# Altium PCB OS-2024-Badge-PCB-REV1.PcbDoc
Units mm, origin at the board's own origin, x right, y up, seen from the top; angles counter-clockwise.
Board outline 69.72 x 87.12 mm, 2 copper layers (Top Layer, Bottom Layer); 98 components, 73 nets, 274 pads, 69 vias.
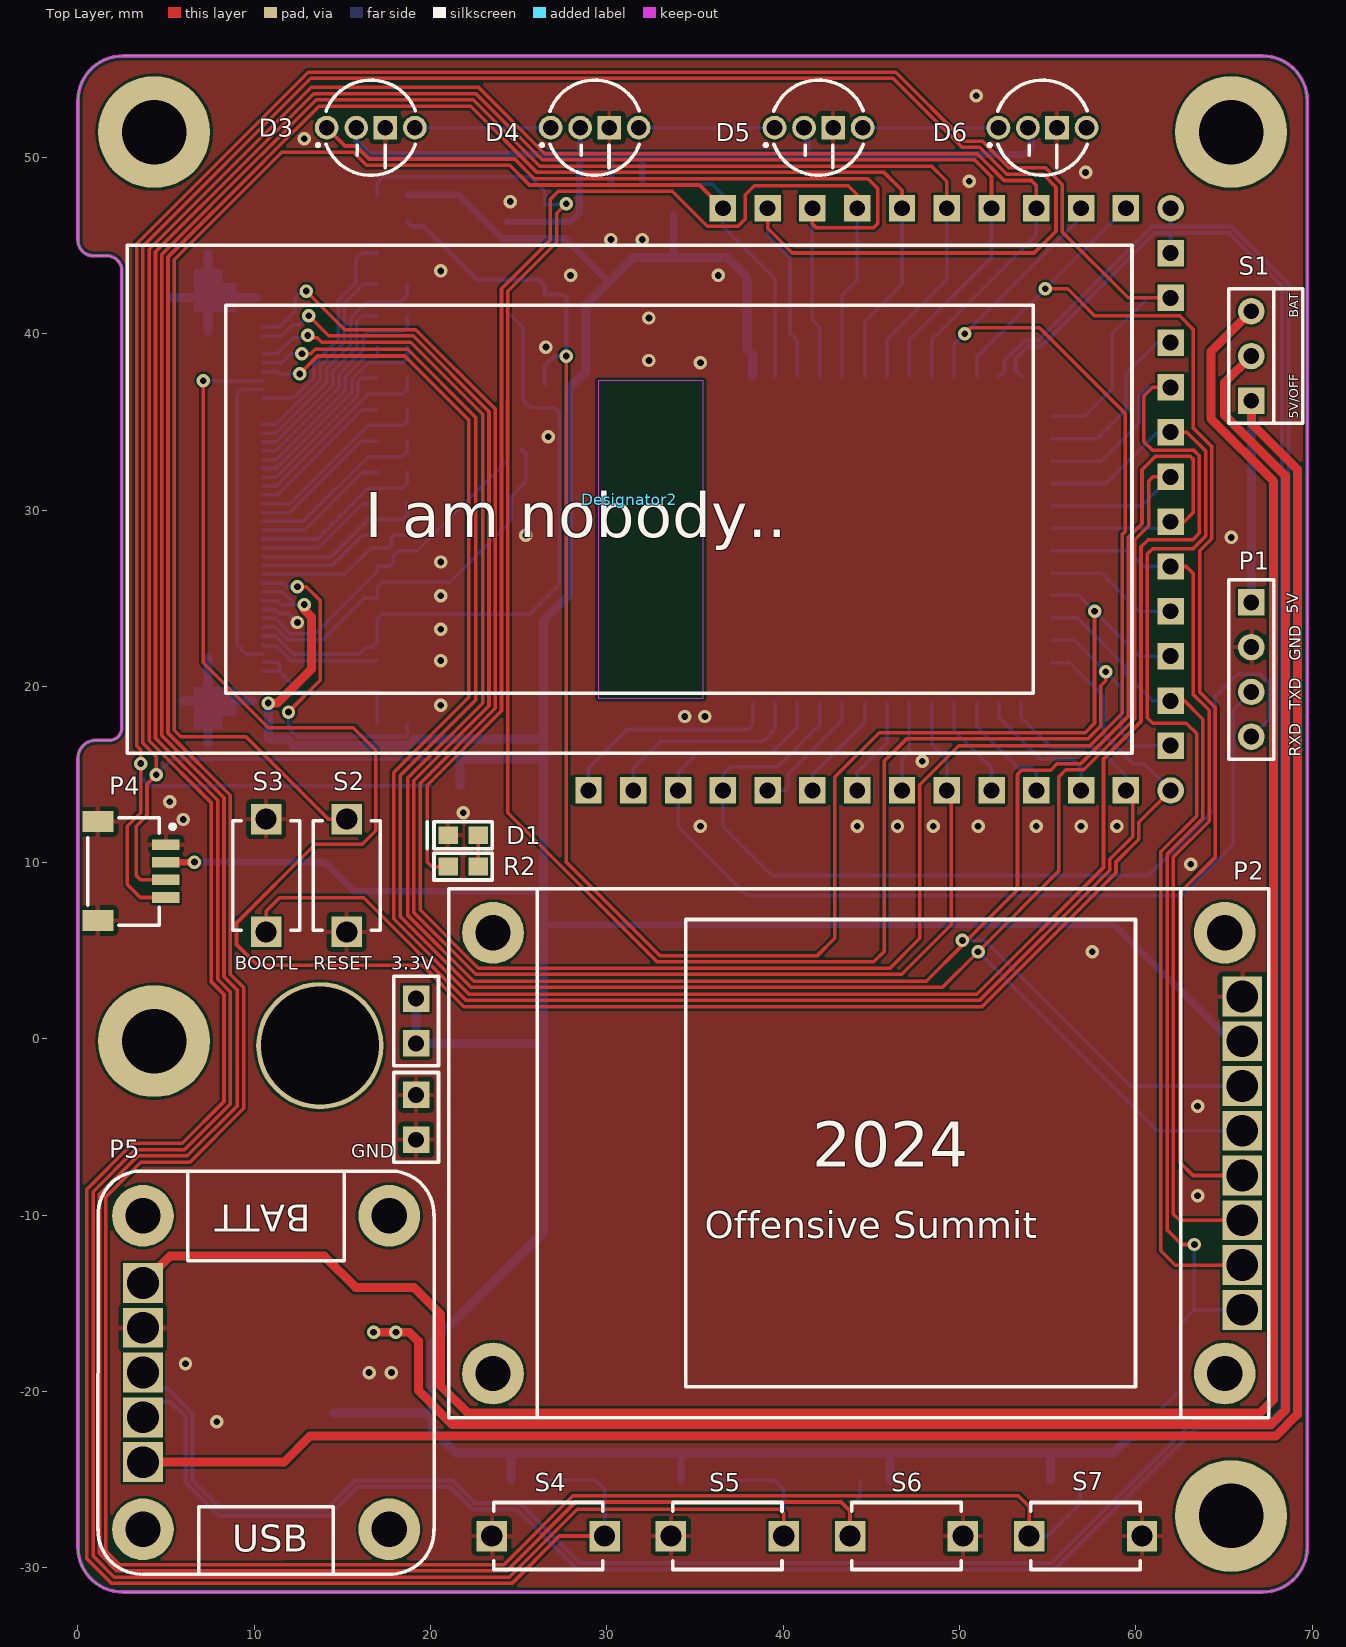
[diagram p0: Top Layer view]
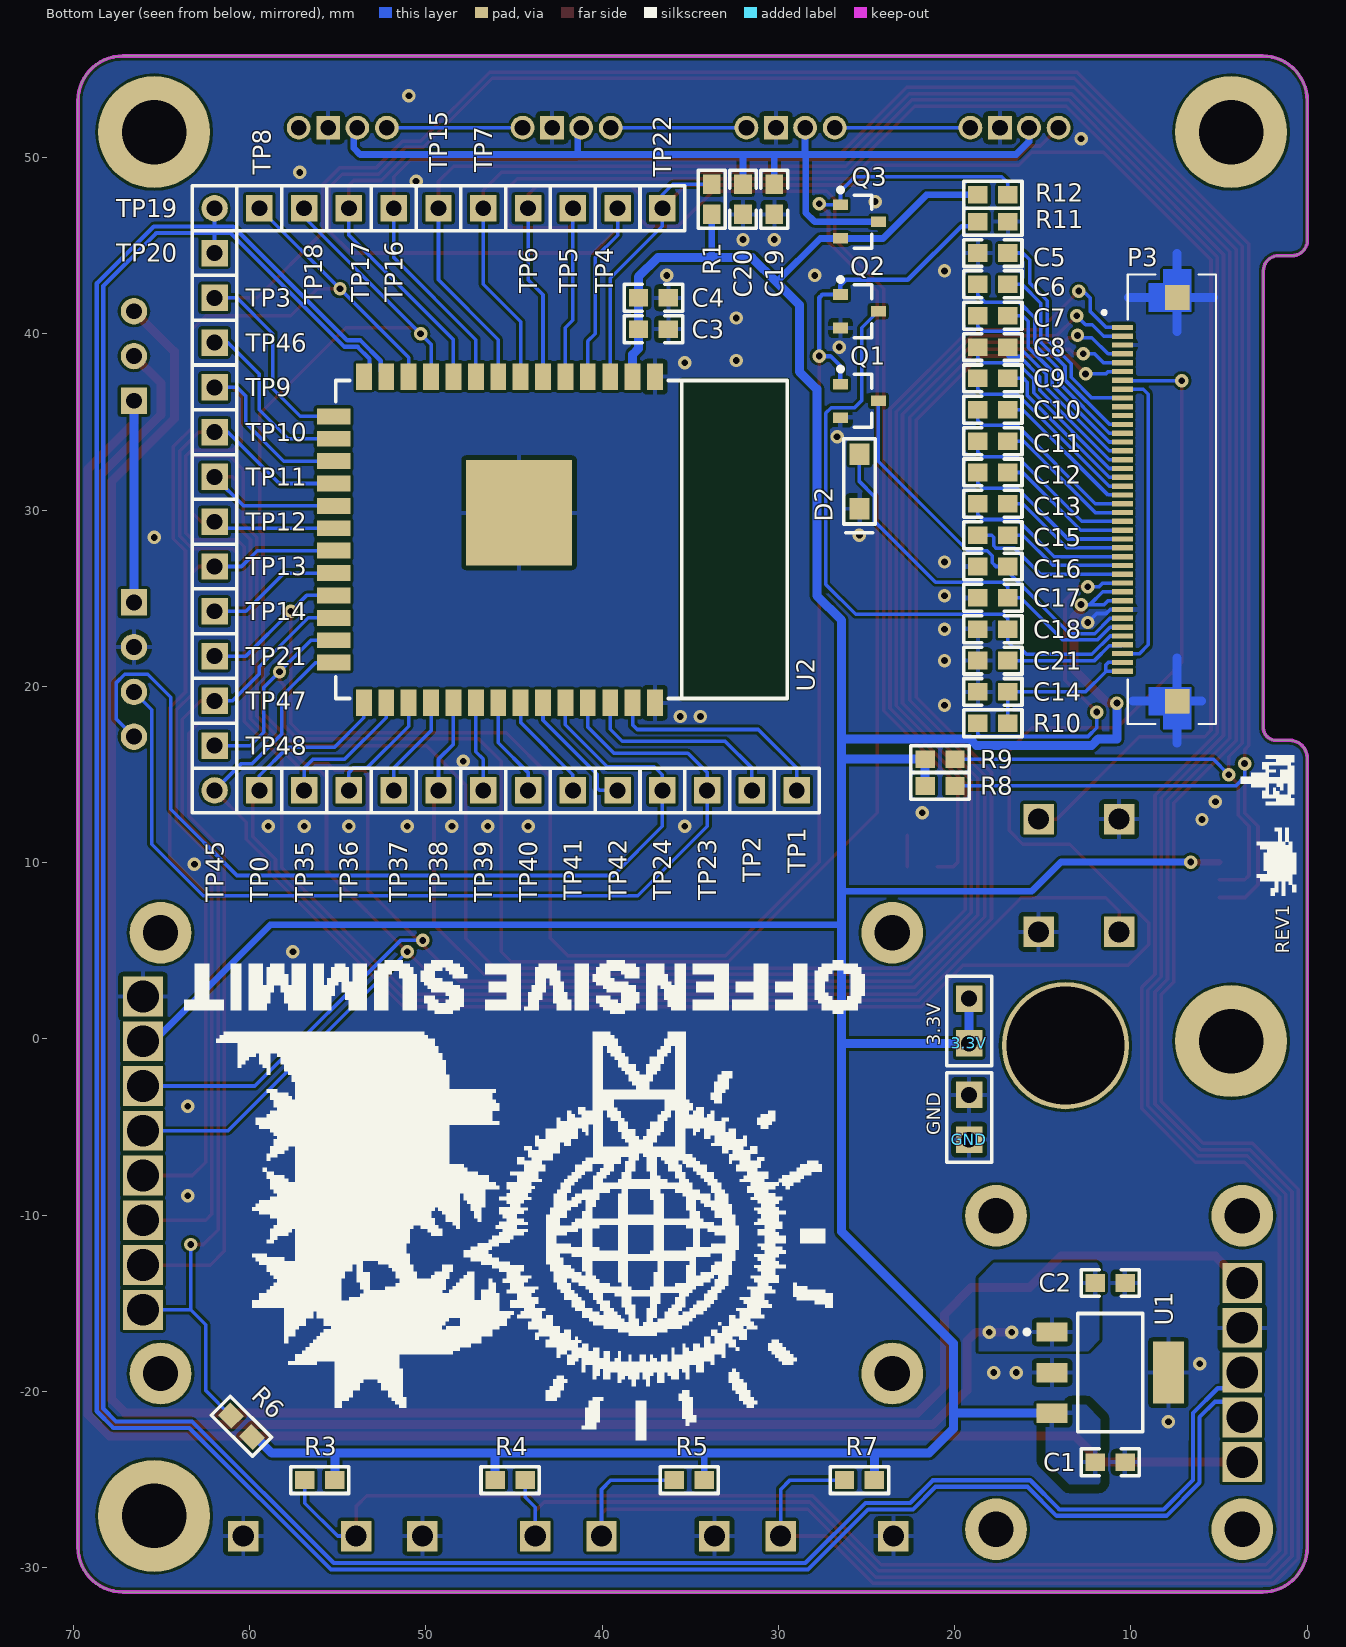
[diagram p1: Bottom Layer view, seen from below]

## Layer stack, top to bottom
Top Solder: solder mask 0.0102, Solder Resist, Dk 3.5
Top Layer: signal copper 0.0356
Dielectric1: dielectric 0.32, FR-4, Dk 4.8
Bottom Layer: signal copper 0.0356
Bottom Solder: solder mask 0.0102, Solder Resist, Dk 3.5

## Board outline
0,-28.829 0,15.926 cw(c1.016,15.926) 1.016,16.942 1.778,16.942 ccw(c1.778,17.653) 2.489,17.653 2.489,43.561 ccw(c1.626,43.561) 1.626,44.425 0.864,44.425 cw(c0.864,45.288) 0,45.288 0,53.213 cw(c2.54,53.213) 2.54,55.753 67.183,55.753 cw(c67.183,53.213) 69.723,53.213 69.723,-28.829 cw(c67.183,-28.829) 67.183,-31.369 2.54,-31.369 cw(c2.54,-28.829)

## Design rules (kind name [scope] priority, off if disabled: settings)
Clearance Clearance_2 [(InPolygon AND InNet('3.3V')) vs (InPolygon AND InNet('GND'))] p1: gap=0.508 ignorepadtopadclearanceinfootprint=FALSE
Clearance Clearance_3 [InNet('DP') vs InNet('DM')] p2: gap=0.127 ignorepadtopadclearanceinfootprint=FALSE except(0: Arc-Hole Track-Hole SMDPad-Hole THPad-Hole Via-Hole Fill-Hole Poly-Hole Region-Hole Text-Hole)
Clearance Clearance_1 [InNetClass('USB') vs InNet('GND')] p3: gap=0.127 ignorepadtopadclearanceinfootprint=FALSE except(0: Arc-Hole Track-Hole SMDPad-Hole THPad-Hole Via-Hole Fill-Hole Poly-Hole Region-Hole Text-Hole)
Clearance [All] p4: gap=0.152 ignorepadtopadclearanceinfootprint=FALSE except(0: Arc-Hole Track-Hole SMDPad-Hole THPad-Hole Via-Hole Fill-Hole Poly-Hole Region-Hole Text-Hole)
HoleSize [All] p1: absolutevalues=TRUE maxlimit=6.858 minlimit=0.381 maxpercent=80.000 minpercent=20.000
MinimumSolderMaskSliver [All] p1: minsoldermaskwidth=0.064
PolygonConnect PolygonConnect_1 [IsVia vs IsPolygon] p1: connectstyle=Direct reliefconductorwidth=0.254 reliefentries=4 polygonreliefangle="90 Angle" airgapwidth=0.254
PolygonConnect [All] p2: connectstyle=Relief reliefconductorwidth=0.254 reliefentries=4 polygonreliefangle="90 Angle" airgapwidth=0.254
RoomDefinition OS-2024-Badge-Schematic-REV1 [InComponentClass('OS-2024-Badge-Schematic-REV1')] p1: confinementstyle=ConfineIn formatcopy=TRUE lockcomponents=FALSE outline -227.64,-182.725 -176.84,-182.725 -176.84,-157.325 -227.64,-157.325
RoutingVias [All] p1: holewidth=0.381 width=0.762 viastyle="Through Hole" minholewidth=0.381 minwidth=0.762 maxholewidth=0.381 maxwidth=0.762
SilkToSolderMaskClearance SilkscreenOverComponentPads [IsPad] p1: minsilkscreentomaskgap=0.076 clearancetoexposedcopper=TRUE
SolderMaskExpansion [All] p1: expansion=0.102
Width Width_1 [InNetClass('USB')] p1: maxlimit=0.241 minlimit=0.241 preferedwidth=0.241
Width [All] p2: maxlimit=0.635 minlimit=0.203 preferedwidth=0.203
27 further rules are at their usual default settings.

## Classes and differential pairs
net class USB: DM DP

## Components (designator, comment, footprint, x,y, rotation, side; value= is the part's Value field where it differs from the comment)
3.3V "Test Point" Testpoint#1 19.177,-0.254 r90 bottom (schematic designator 2)
3.3V "Test Point" Testpoint#2 19.177,2.286 r90 bottom (schematic designator 1)
C1 "1u" 0603C 11.176,-24.003 r180 bottom
C2 "1u" 0603C 11.176,-13.843 r180 bottom
C3 "10u" 0603C 37.084,40.259 r180 bottom
C4 "100n" 0603C 37.084,42.037 r180 bottom
C5 "2.2u" 0603C 17.828,44.577 r180 bottom
C6 "2.2u" 0603C 17.828,42.799 r0 bottom
C7 "2.2u" 0603C 17.828,41.021 r0 bottom
C8 "2.2u" 0603C 17.828,39.243 r0 bottom
C9 "2.2u" 0603C 17.828,37.465 r0 bottom
C10 "2.2u" 0603C 17.828,35.687 r180 bottom
C11 "2.2u" 0603C 17.828,33.909 r180 bottom
C12 "2.2u" 0603C 17.828,32.131 r180 bottom
C13 "2.2u" 0603C 17.828,30.353 r180 bottom
C14 "1u" 0603C 17.828,19.685 r180 bottom
C15 "2.2u" 0603C 17.828,28.575 r180 bottom
C16 "2.2u" 0603C 17.828,26.797 r0 bottom
C17 "2.2u" 0603C 17.828,25.019 r0 bottom
C18 "2.2u" 0603C 17.828,23.241 r0 bottom
C19 "10u" 0603C 30.226,47.625 r270 bottom
C20 "1u" 0603C 32.004,47.625 r270 bottom
C21 "2.2u" 0603C 17.828,21.463 r0 bottom
D1 "LED2" 0603LED 21.844,11.557 r180 top
D2 "40V" SOD-123FL 25.4,31.623 r90 bottom
D3 "RGB" COM-12986 16.607,51.689 r0 top
D4 "RGB" COM-12986 29.307,51.689 r0 top
D5 "RGB" COM-12986 42.007,51.689 r0 top
D6 "RGB" COM-12986 54.707,51.689 r0 top
Designator2 "Comment" E2200CS021 31.282,30.607 r0 top
GND "Test Point" Testpoint#2 19.177,-3.175 r90 bottom
GND "Test Point" Testpoint#1 19.177,-5.715 r90 bottom
P1 "Header 4" HDR1X4 66.548,24.765 r270 top
P2 "Header 8" TFT144SPI 44.29,-6.477 r270 top
P3 "CONN FPC BOTTOM 40POS 0.5MM R/A" AMPHENOL_62684-401100AHLF 6.906,30.607 r90 bottom locked
P4 "SM04B-SRSS-TB" SM04B-TRSS-TB 3.048,9.525 r270 top
P5 "Header 5" MICRO-LIPO-USBC 10.668,-18.923 r270 top
Q1 "2N7002" SOT-23-N 25.4,36.195 r180 bottom
Q2 "2N7002" SOT-23-N 25.4,41.275 r180 bottom
Q3 "DMP2045U" SOT-23-P 25.4,46.355 r180 bottom
R1 "1k" 0603R 33.782,47.625 r270 bottom
R2 "1k" 0603R 21.844,9.779 r0 top
R3 "DNP" 0603R 56.007,-25.019 r180 bottom
R4 "DNP" 0603R 45.212,-25.019 r0 bottom
R5 "DNP" 0603R 35.052,-25.019 r180 bottom
R6 "330" 0603R 60.452,-21.971 r225 bottom
R7 "DNP" 0603R 25.4,-25.019 r180 bottom
R8 "10k" 0603R 20.828,14.351 r180 bottom
R9 "10k" 0603R 20.828,15.875 r180 bottom
R10 "2k" 0603R 17.828,17.907 r0 bottom
R11 "47k" 0603R 17.828,46.355 r180 bottom
R12 "47k" 0603R 17.828,47.879 r180 bottom
S1 "SW-SPDT" HDR1X3 66.548,36.195 r90 top
S2 "SPST-NO" PTS636SL43LFS 15.24,9.271 r270 top
S3 "SPST-NO" PTS636SL43LFS 10.668,9.271 r90 top
S4 "SPST-NO" PTS636SL43LFS 26.67,-28.194 r180 top
S5 "SPST-NO" PTS636SL43LFS 36.83,-28.194 r180 top
S6 "SPST-NO" PTS636SL43LFS 46.99,-28.194 r0 top
S7 "SPST-NO" PTS636SL43LFS 57.15,-28.194 r0 top
TP0 "Test Point" Testpoint#2 59.436,14.097 r0 bottom
TP1 "Test Point" Testpoint#2 28.956,14.097 r0 bottom
TP2 "Test Point" Testpoint#2 31.496,14.097 r90 bottom
TP3 "Test Point" Testpoint#2 61.976,42.037 r90 bottom
TP4 "Test Point" Testpoint#2 39.116,47.117 r0 bottom
TP5 "Test Point" Testpoint#2 41.656,47.117 r0 bottom
TP6 "Test Point" Testpoint#2 44.196,47.117 r90 bottom
TP7 "Test Point" Testpoint#2 46.736,47.117 r90 bottom
TP8 "Test Point" Testpoint#2 59.436,47.117 r90 bottom
TP9 "Test Point" Testpoint#2 61.976,36.957 r0 bottom
TP10 "Test Point" Testpoint#2 61.976,34.417 r0 bottom
TP11 "Test Point" Testpoint#2 61.976,31.877 r180 bottom
TP12 "Test Point" Testpoint#2 61.976,29.337 r270 bottom
TP13 "Test Point" Testpoint#2 61.976,26.797 r180 bottom
TP14 "Test Point" Testpoint#2 61.976,24.257 r90 bottom
TP15 "Test Point" Testpoint#2 49.276,47.117 r90 bottom
TP16 "Test Point" Testpoint#2 51.816,47.117 r180 bottom
TP17 "Test Point" Testpoint#2 54.356,47.117 r180 bottom
TP18 "Test Point" Testpoint#2 56.896,47.117 r180 bottom
TP19 "Test Point" Testpoint#3 61.976,47.117 r180 bottom
TP20 "Test Point" Testpoint#2 61.976,44.577 r90 bottom
TP21 "Test Point" Testpoint#2 61.976,21.717 r90 bottom
TP22 "Test Point" Testpoint#2 36.576,47.117 r0 bottom
TP23 "Test Point" Testpoint#2 34.036,14.097 r0 bottom
TP24 "Test Point" Testpoint#2 36.576,14.097 r90 bottom
TP35 "Test Point" Testpoint#2 56.896,14.097 r180 bottom
TP36 "Test Point" Testpoint#2 54.356,14.097 r90 bottom
TP37 "Test Point" Testpoint#2 51.816,14.097 r270 bottom
TP38 "Test Point" Testpoint#2 49.276,14.097 r90 bottom
TP39 "Test Point" Testpoint#2 46.736,14.097 r270 bottom
TP40 "Test Point" Testpoint#2 44.196,14.097 r180 bottom
TP41 "Test Point" Testpoint#2 41.656,14.097 r90 bottom
TP42 "Test Point" Testpoint#2 39.116,14.097 r90 bottom
TP45 "Test Point" Testpoint#3 61.976,14.097 r90 bottom
TP46 "Test Point" Testpoint#2 61.976,39.497 r90 bottom
TP47 "Test Point" Testpoint#2 61.976,19.177 r0 bottom
TP48 "Test Point" Testpoint#2 61.976,16.637 r0 bottom
U1 "TC1262-3.3VDBTR" SOT-223-2 11.176,-18.923 r270 bottom
U2 "ESP32-S3-WROOM" ESP32-S3-WROOM-1-N16R8 29.504,37.345 r270 bottom

## Footprints (in the part's own frame and the unit in brackets; to place one, negate y for a bottom-side part, rotate by r counter-clockwise, add the part's x,y. Pads: shape width x height; smd on the part's side, far side on the other; paste and mask are expansions set on the pad)
0603C [mm] "Chip Capacitor, Body 1.6x0.8mm, IPC High Density"
  rect 1.1x1 smd: 1(-0.85,0) 2(0.85,0)
  silkscreen extent -1.65,-0.76 1.65,0.76, body extent -0.87,-0.48 0.87,0.48, height 1.3
0603LED [mm] "Chip Diode; Body 1.6 x 0.9 mm (LxW typ)"
  rect 1.1x1 smd: 1(-0.85,0) 2(0.85,0)
  silkscreen extent -1.65,-0.76 2.03,0.76, body extent -0.8,-0.45 0.8,0.45, height 0.55
0603R [mm] "Chip Resistor; Body 1.6 x 0.9 mm (LxW typ)"
  rect 1.1x1 smd: 1(-0.85,0) 2(0.85,0)
  silkscreen extent -1.65,-0.76 1.65,0.76, body extent -0.8,-0.45 0.8,0.45, height 0.55
AMPHENOL_62684-401100AHLF [mm]
  rect 0.3x1.2 smd: 1(9.75,3.575) 2(9.25,3.575) 3(8.75,3.575) 4(8.25,3.575) 5(7.75,3.575) 6(7.25,3.575) 7(6.75,3.575) 8(6.25,3.575) 9(5.75,3.575) 10(5.25,3.575) 11(4.75,3.575) 12(4.25,3.575) 13(3.75,3.575) 14(3.25,3.575) 15(2.75,3.575) 16(2.25,3.575) 17(1.75,3.575) 18(1.25,3.575) 19(0.75,3.575) 20(0.25,3.575) 21(-0.25,3.575) 22(-0.75,3.575) 23(-1.25,3.575) 24(-1.75,3.575) 25(-2.25,3.575) 26(-2.75,3.575) 27(-3.25,3.575) 28(-3.75,3.575) 29(-4.25,3.575) 30(-4.75,3.575) 31(-5.25,3.575) 32(-5.75,3.575) 33(-6.25,3.575) 34(-6.75,3.575) 35(-7.25,3.575) 36(-7.75,3.575) 37(-8.25,3.575) 38(-8.75,3.575) 39(-9.25,3.575) 40(-9.75,3.575)
  rect 1.4x1.4 smd paste-2 mask+0: S1(-11.45,0.475) S2(11.45,0.475)
  Top Layer region: -10.65,-0.325 -13.05,-0.325 -13.05,1.275 -12.25,1.275 -12.25,2.075 -10.65,2.075
  Top Layer region: 12.25,1.275 13.05,1.275 13.05,-0.325 10.65,-0.325 10.65,2.075 12.25,2.075
  silkscreen extent -12.75,-1.73 12.75,4.71, body extent -12.75,-2.5 12.75,3.1, height 2
COM-12986 [mil] "ADDRESS LED DISCR SERIAL RGB 5PC"
  round 53 hole 35: 1(-98.43,0) 2(-32.48,0) 4(98.43,0)
  rect 53x53 hole 35: 3(32.48,0)
  silkscreen extent -121,-106 100,106
E2200CS021 [mm] "E2200CS021 DISPLAY 2.0\" B&W AURORA MB EC"
  silkscreen extent -28.5,-14.4 28.5,14.4, body extent -28.5,-14.4 28.5,14.4, height 1
ESP32-S3-WROOM-1-N16R8 [mm] "ESP32-S3-WROOM-1-N16R8"
  rect 1.5x0.9 smd: 1(-0.225,-7.493) 2(-0.225,-8.763) 3(-0.225,-10.033) 4(-0.225,-11.303) 5(-0.225,-12.573) 6(-0.225,-13.843) 7(-0.225,-15.113) 8(-0.225,-16.383) 9(-0.225,-17.653) 10(-0.225,-18.923) 11(-0.225,-20.193) 12(-0.225,-21.463) 13(-0.225,-22.733) 14(-0.225,-24.003) 27(18.284,-24.003) 28(18.284,-22.733) 29(18.284,-21.463) 30(18.284,-20.193) 31(18.284,-18.923) 32(18.284,-17.653) 33(18.284,-16.383) 34(18.284,-15.113) 35(18.284,-13.843) 36(18.284,-12.573) 37(18.284,-11.303) 38(18.284,-10.033) 39(18.284,-8.763) 40(18.284,-7.493)
  rect 0.9x1.9 smd paste-0.686: 15(2.03,-25.718) 16(3.3,-25.718) 17(4.57,-25.718) 18(5.84,-25.718) 19(7.11,-25.718) 20(8.38,-25.718) 21(9.65,-25.718) 22(10.92,-25.718) 23(12.19,-25.718) 24(13.46,-25.718)
  rect 0.9x1.9 smd: 25(14.73,-25.718) 26(16,-25.718)
  rect 6x6 smd paste-3.048: 101(7.5,-15.2)
  Keep-Out Layer region: 0,0 18.034,0 18.034,-5.969 0,-5.969
  silkscreen extent 0,-25.6 18.03,0
HDR1X3 [mm] "Connector; Header; 3 Position"
  rect 1.5x1.5 hole 0.9: 1(0,0)
  round 1.5 hole 0.9: 2(2.54,0) 3(5.08,0)
  silkscreen extent -1.27,-1.27 6.35,1.27
HDR1X4 [mm] "Connector; Header; 4 Position"
  rect 1.5x1.5 hole 0.9: 1(0,0)
  round 1.5 hole 0.9: 2(2.54,0) 3(5.08,0) 4(7.62,0)
  silkscreen extent -1.27,-1.27 8.89,1.27
MICRO-LIPO-USBC [mm] "Adafruit MicroLipo USB Charger"
  rect 2.257x2.257 hole 1.8: 1(5.08,-6.985) 2(2.54,-6.985) 3(0,-6.985) 4(-2.54,-6.985) 5(-5.08,-6.985)
  round 3.5 hole 2: M1(-8.89,6.985) M1(-8.89,-6.985) M1(8.89,6.985) M1(8.89,-6.985)
  silkscreen extent -11.43,-9.54 11.43,9.53
PTS636SL43LFS [mm] "Tactile Switch SPST-NO Top Actuated Through Hole"
  rect 1.727x1.727 hole 1.2: 1(-3.2,0) 2(3.2,0)
  silkscreen extent -3.1,-1.9 3.1,1.9, body extent -3.38,-1.75 3.38,1.75, height 5
SM04B-TRSS-TB [mm] "CONN HEADER SMD R/A 4POS 1MM"
  rect 1.2x1.749 smd: 0(-2.8,-1.912) 0(2.8,-1.912)
  rect 0.6x1.55 smd: 1(-1.5,1.938) 2(-0.5,1.938) 3(0.5,1.938) 4(1.5,1.938)
  silkscreen extent -3.02,-2.51 3.07,2.44, body extent -3.02,-2.51 3.07,1.56, height 6.25
SOD-123FL [mm] "DIODE SCHOTTKY 40V 2A SOD123FL"
  rect 1.22x1.15 smd: 1(-1.55,0) 2(1.55,0)
  silkscreen extent -2.92,-0.89 2.41,0.89, body extent -1.45,-0.95 1.45,0.95, height 1.1
SOT-23-N [mm] "MOSFET N-CH 60V 280MA SOT23-3"
  rect 0.85x0.6 smd: 1(-1.075,0.95) 2(-1.075,-0.95) 3(1.075,0)
  silkscreen extent -1.2,-1.5 0.7,1.92, body extent -0.7,-1.5 0.7,1.5, height 1.1
SOT-23-P [mm] "MOSFET P-CH 20V 4A SOT23-3"
  rect 0.85x0.6 smd: D(1.075,0) G(-1.075,0.95) S(-1.075,-0.95)
  silkscreen extent -1.2,-1.5 0.7,1.92, body extent -0.7,-1.5 0.7,1.5, height 1.1
SOT-223-2 [mm] "SOT-223/SC-73; 4 Leads; Body 6.7 x 7.3 mm, inc. leads (LxW max)"
  rect 1.1x1.75 smd: 1(-2.3,-3.3) 2(0,-3.3) 3(2.3,-3.3)
  rect 3.5x1.75 smd: 4(0,3.3)
  silkscreen extent -3.35,-4.85 3.35,1.85, body extent -3.35,-3.7 3.35,3.5, height 1.85
Testpoint#1 [mm] "1 Pos Header"
  rect 1.5x1.5 hole 0.9: 2(0,0)
  silkscreen extent -1.27,-1.27 1.27,1.27
Testpoint#2 [mm] "1 Pos Header"
  rect 1.5x1.5 hole 0.9: 1(0,0)
  silkscreen extent -1.27,-1.27 1.27,1.27
Testpoint#3 [mm] "1 Pos Header"
  round 1.5 hole 0.9: 1(0,0)
  silkscreen extent -1.27,-1.27 1.27,1.27
TFT144SPI [mm] "1.44\" 128x128 65K SPI Full Color TFT LCD Display Module ST7735 OLED for Arduino"
  rect 2.257x2.257 hole 1.8: 1(-8.89,21.75) 2(-6.35,21.75) 3(-3.81,21.75) 4(-1.27,21.75) 5(1.27,21.75) 6(3.81,21.75) 7(6.35,21.75) 8(8.89,21.75)
  round 3.5 hole 2: M1(-12.5,20.75) M2(12.5,20.75) M3(-12.5,-20.75) M4(12.5,-20.75)
  silkscreen extent -15,-23.25 15,23.25

## Part data
3.3V 3.3V GND GND TP0 TP1 TP2 TP3 TP4 TP5 TP6 TP7 TP8 TP9 TP10 TP11 TP12 TP13 TP14 TP15 TP16 TP17 TP18 TP19 TP20 TP21 TP22 TP23 TP24 TP35 TP36 TP37 TP38 TP39 TP40 TP41 TP42 TP45 TP46 TP47 TP48: library part TestPoint, "Test Point Do Not Populate", Distributor Part Number=NONE, Distributor=NONE, Manufacturer=NONE, Manufacturer Part Number=NONE, MFG-Comment="DO NOT POPULATE!"
C1 C2 C14 C20: library part Cap, "CAP CER 1UF 50V Z5U 0603", Distributor Part Number=490-12331-1-ND, Manufacturer="Murata Electronics North America", Manufacturer Part Number=GRT188R61H105ME13D, Distributor=Digikey
C3 C19: library part Cap, "CAP CER 10UF 10V X5R 0603", Distributor Part Number=490-14372-1-ND, Manufacturer="Murata Electronics North America", Manufacturer Part Number=GRN188R61A106KE69J, Distributor=Digikey
C4: library part Cap, "CAP CER .1UF 10V X7R 0603", Distributor Part Number=732-7939-1-ND, Manufacturer="Wurth Electronics Inc.", Manufacturer Part Number=885012206020, Distributor=Digikey
C5 C6 C7 C8 C9 C10 C11 C12 C13 C15 C16 C17 C18 C21: library part Cap, "CAP CER 2.2UF 10V X5R 0603", Distributor Part Number=2571-GMC10X5R225M10NTTR-ND, Manufacturer="Cal-Chip Electronics, Inc.", Manufacturer Part Number=GMC10X5R225M10NT, Distributor=Digikey
D1: "LED ORANGE CLEAR CHIP SMD", Distributor Part Number=754-1120-1-ND, Manufacturer=Kingbright, Manufacturer Part Number=AOT1608SECK, Distributor=Digi-Key
D2: library part "Diode BAT17", "DIODE SCHOTTKY 40V 2A SOD123FL", Distributor Part Number=3757-SS2040FL_R1_00001CT-ND, Manufacturer="Panjit International Inc.", Manufacturer Part Number=SS2040FL_R1_00001, Distributor=Digikey
D3 D4 D5 D6: library part LED2_1, "ADDRESS LED DISCR SERIAL RGB", Distributor Part Number=1568-1213-ND, Manufacturer="Spark Fun", Manufacturer Part Number=COM-12986, Distributor=Digi-Key
P1: "Header, 4-Pin", Distributor Part Number=732-5317-ND, Manufacturer="Wurth Elektronik", Manufacturer Part Number=61300411121, Distributor=Digi-Key
P2: library part Display_128_128, "1.44\" 128x128 65K SPI Full Color TFT LCD Display Module ST7735 OLED for Arduino", Distributor Part Number=ED90446-ND, Manufacturer=Mill-Max, Manufacturer Part Number=7406-0-15-15-18-27-10-0, Distributor=DigiKey, MFG-Comment="8 each for P2", Old Header=S7006-ND
P3: library part "Header 40", Distributor Part Number=609-62684-401100AHLFTR-ND, Manufacturer="Amphenol ICC (FCI)", Manufacturer Part Number=62684-401100AHLF, Distributor=Digi-Key
P4: library part "Header 5", "CONN HEADER SMD R/A 4POS 1MM", Distributor Part Number=455-SM04B-SRSS-TBCT-ND, Manufacturer="JST Sales America Inc.", Distributor=Digikey, Manufacturer Part Number=SM04B-SRSS-TB
P5: "Adafruit Micro-Lipo Charger for LiPoly Batt with USB Type C Jack", Distributor Part Number=ED90446-ND, Manufacturer=Mill-Max, Manufacturer Part Number=7406-0-15-15-18-27-10-0, Distributor=Digikey, MFG-Comment="5 each for P5"
Q1 Q2: library part NMOS-2, "MOSFET N-CH 60V 280MA SOT23-3", Distributor Part Number=4878-2N7002CT-ND, Manufacturer="Diotec Semiconductor", Distributor=Digikey, Manufacturer Part Number=2N7002
Q3: library part PMOS-2, "P-Channel Power MOSFET", Distributor Part Number=DMP2045U-7DICT-ND, Manufacturer="Diodes Incorporated", Manufacturer Part Number=DMP2045U-7, Distributor=Digikey
R1 R2: library part Res2, "RES SMD 1K OHM 5% 1/10W 0603", Distributor Part Number=311-1.0KGRCT-ND, Manufacturer=Yageo, Manufacturer Part Number=RC0603JR-071KL, Distributor=Digikey
R3 R4 R5 R7: library part Res2, "RES SMD 1K OHM 5% 1/10W 0603", Distributor Part Number=NONE, Distributor=NONE, Manufacturer=NONE, Manufacturer Part Number=NONE, MFG-Comment="DO NOT POPULATE"
R6: library part Res2, "RES SMD 330 OHM 5% 1/10W 0603", Distributor Part Number=311-330GRCT-ND, Manufacturer=Yageo, Manufacturer Part Number=RC0603JR-07330RL, Distributor=Digikey
R8 R9: library part Res2, "RES SMD 10K OHM 5% 1/10W 0603", Distributor Part Number=311-10KGRCT-ND, Manufacturer=Yageo, Manufacturer Part Number=RC0603JR-0710KL, Distributor=Digikey
R10: library part Res2, "RES SMD 2K OHM 5% 1/10W 0603", Distributor Part Number=311-2.0KGRCT-ND, Manufacturer=Yageo, Manufacturer Part Number=RC0603JR-072KL, Distributor=Digikey
R11 R12: library part Res2, "RES SMD 47K OHM 5% 1/10W 0603", Distributor Part Number=311-47KGRCT-ND, Manufacturer=Yageo, Manufacturer Part Number=RC0603JR-0747KL, Distributor=Digikey
S1: "SWITCH SLIDE SPDT 200MA 30V", Distributor Part Number=EG1903-ND, Manufacturer=E-Switch, Manufacturer Part Number=EG1218, Distributor=Digikey
S2 S3 S4 S5 S6 S7: library part "SPST-NO 2 PIN", "Tactile Switch SPST-NO Top Actuated Through Hole", Distributor Part Number=CKN12301-ND, Manufacturer=C&K, Manufacturer Part Number="PTS636 SL43 LFS", Distributor=Digikey
U1: library part "Header 3", "IC REG LINEAR 3.3V 500mA SOT223-3", Distributor Part Number=TC1262-3.3VDBCT-ND, Manufacturer="Microchip Technology", Distributor=Digikey, Manufacturer Part Number=TC1262-3.3VDBTR
U2: "Bluetooth, WiFi 802.11b/g/n, Bluetooth v5.0 Transceiver Module 2.4GHz PCB Trace Surface Mount", Distributor Part Number=1965-ESP32-S3-WROOM-1-N16R8TR-ND, Manufacturer="Espressif Systems", Manufacturer Part Number=ESP32-S3-WROOM-1-N16R8, Distributor=Digikey, MFG-Comment="No Solder paste on large GND pad, No solder paste on extra pads!!  See OS-2020-Badge-REV0-Assembly-Revised.pdf"

## Free pads (board coordinates)
  round 6.35 hole 3.658: 0(4.318,-0.127) 0(4.318,51.435) 0(65.405,-27.051) 0(65.405,51.435)
  round 7.214 hole 6.7: 0(13.716,-0.381)

## Via types
v1: diameter 0.762, hole 0.381, Top Layer to Bottom Layer, 69 vias

## Nets (pads, with @x,y where several pads share a name; then routed paths per layer and width w, separated by ;. In a path a pad name is that pad's centre, name@x,y a point inside that pad or via, vN(x,y) a via of type N, cw(c..) or ccw(c..) an arc to the next point about the centre after c; other vN are vias at no path point)
3.3V: 3.3V.1 3.3V.2 C1.1 C3.1 C4.1 P2.2 P3.31 P3.32 P4.2 Q3.S R1.2 R3.2 R4.2 R5.2 R6.2 R7.2 R8.1 R9.1 R12.1 U1.3 U2.2 | length 262.6
  Top Layer w0.381: P4.2 6.596,10.025 v1(6.604,10.033)
  Top Layer w0.508: v1(10.795,19.05) 11.303,19.05 13.233,20.98 13.233,23.948 12.827,24.355 v1(12.827,24.638)
  Bottom Layer w0.203: P3.32 11.303,24.857 11.522,24.638 12.324,24.638 ; P3.31 11.605,25.357 12.324,24.638 ; v1(12.827,24.638) 12.324,24.638
  Bottom Layer w0.381: v1(6.604,10.033) 13.97,10.033 15.621,8.382 26.416,8.382 ; R12.1 21.59,47.879 24.064,45.405 Q3.S 27.62,45.405 30.099,42.926 ; 26.416,6.477 58.801,6.477 65.405,-0.127 P2.2 ; 27.739,36.244 27.813,36.17 ; 33.782,44.323 R1.2 ; 34.036,-23.495 34.202,-23.661 R5.2
  Bottom Layer w0.508: v1(10.795,19.05) 10.795,17.018 11.855,17.018 12.228,16.645 18.76,16.645 19.116,17.001 26.306,17.001 26.416,16.891 ; U1.3 20.066,-21.223 ; 3.3V.1 3.3V.2 26.416,-0.254 ; R8.1 R9.1 26.416,15.875 ; R7.2 24.55,-23.495 ; U2.2 38.267,38.822 37.934,39.155 C3.1 C4.1 37.934,43.219 36.83,44.323 33.782,44.323 31.496,44.323 30.099,42.926 28.804,41.631 28.804,37.846 27.813,36.855 27.813,36.17 27.813,25.146 26.416,23.749 26.416,16.891 ; R4.2 46.062,-23.583 45.974,-23.495 ; R3.2 55.157,-23.534 55.118,-23.495 ; R6.2 59.646,-22.572 58.723,-23.495 55.118,-23.495 ; 20.066,-21.223 20.066,-22.098 21.463,-23.495 24.55,-23.495 ; 20.066,-21.223 20.066,-17.272 26.416,-10.922 26.416,-0.254 ; 24.55,-23.495 34.036,-23.495 45.974,-23.495 ; 26.416,-0.254 26.416,6.477 26.416,8.382 26.416,15.875 ; 26.416,15.875 26.416,16.891 ; 45.974,-23.495 55.118,-23.495
5V: P1.1 P5.1 S1.1 | length 136.6
  Top Layer w0.508: P5.1 11.684,-24.003 13.157,-22.53 67.934,-22.53 69.164,-21.3 69.164,32.309 66.548,34.925 S1.1
  Bottom Layer w0.508: P1.1 S1.1
BL: P2.8 R6.1 TP47.1 U2.24 | length 56.8
  Top Layer w0.203: TP47.1 62.763,19.177 63.805,18.136 63.805,12.502 61.773,10.47 61.773,-10.82 62.611,-11.659 v1(63.322,-11.659)
  Bottom Layer w0.203: U2.24 56.658,23.885 59.436,21.107 59.436,20.701 60.96,19.177 TP47.1 TP47.1@62.509,19.177 ; R6.1 62.484,-19.939 62.484,-16.205 63.322,-15.367 ; v1(63.322,-11.659) 63.322,-15.367 ; P2.8 63.322,-15.367
BORDER: P3.8 P3.38 | length 17.5
  Bottom Layer w0.203: P3.38 9.512,21.857 9.017,22.352 9.017,36.576 9.298,36.857 P3.8
BTN1: R3.1 S7.1 TP7.1 U2.7 | length 200
  Top Layer w0.203: TP7.1 46.736,48.133 45.72,49.149 26.03,49.149 22.271,52.908 13.665,52.908 10.82,50.063 10.404,49.647 5.105,44.348 5.105,17.358 8.636,13.828 8.636,3.678 9.398,2.916 9.398,-3.937 6.35,-6.985 3.556,-6.985 1.575,-8.966 1.575,-29.032 2.36,-29.817 11.712,-29.817 24.158,-29.817 28.067,-25.908 53.34,-25.908 53.95,-26.518 S7.1
  Bottom Layer w0.203: U2.7 44.617,40.68 46.736,42.799 TP7.1 ; S7.1@53.95,-27.94 54.204,-28.194 54.991,-28.194 56.857,-26.328 R3.1
BTN2: R4.1 S6.1 TP15.1 U2.8 | length 192.5
  Top Layer w0.203: S6.1 43.79,-26.772 43.282,-26.264 28.219,-26.264 24.31,-30.173 2.212,-30.173 1.219,-29.179 1.219,-8.814 3.404,-6.629 6.203,-6.629 9.042,-3.79 9.042,2.769 8.28,3.531 8.28,13.68 4.75,17.211 4.75,44.496 10.256,50.002 10.465,50.211 13.518,53.264 22.423,53.264 26.182,49.505 48.412,49.505 49.276,48.641 TP15.1
  Bottom Layer w0.203: S6.1 43.79,-26.568 44.362,-25.996 R4.1 ; U2.8 45.887,39.664 49.276,43.053 TP15.1
BTN3: R5.1 S5.1 TP16.1 U2.9 | length 196.7
  Top Layer w0.203: S5.1 40.03,-26.924 39.776,-26.67 28.326,-26.67 24.468,-30.528 2.065,-30.528 0.864,-29.327 0.864,-8.667 3.256,-6.274 6.055,-6.274 8.636,-3.693 8.636,2.667 7.925,3.378 7.925,13.533 4.394,17.064 4.394,44.643 10.109,50.358 13.371,53.619 22.57,53.619 26.33,49.86 50.851,49.86 51.816,48.895 TP16.1
  Bottom Layer w0.203: R5.1@35.902,-25.273 36.156,-25.019 39.497,-25.019 40.03,-25.552 S5.1 ; U2.9 47.157,39.664 51.816,44.323 TP16.1
BTN4: R7.1 S4.1 TP17.1 U2.10 | length 188.3
  Top Layer w0.203: S4.1 27.305,-28.194 24.615,-30.884 1.918,-30.884 0.508,-29.474 0.508,-8.519 3.109,-5.918 5.908,-5.918 8.28,-3.546 8.28,2.52 7.569,3.231 7.569,13.386 4.039,16.916 4.039,44.79 13.223,53.975 22.718,53.975 26.477,50.216 51.003,50.216 52.527,48.692 54.077,48.692 54.356,48.412 TP17.1
  Bottom Layer w0.203: R7.1@26.25,-25.273 26.504,-25.019 29.337,-25.019 29.87,-25.552 S4.1 ; U2.10 48.427,39.664 54.356,45.593 TP17.1
BUSY-D2: P3.2 TP38.1 U2.31 | length 91.9
  Top Layer w0.203: v1(13.081,41.021) 14.224,39.878 19.015,39.878 23.312,35.581 23.312,18.902 19.05,14.64 19.05,7.176 22.563,3.663 46.716,3.663 49.53,6.477 49.53,13.843 TP38.1
  Bottom Layer w0.203: P3.2 11.536,39.857 12.192,40.513 12.573,40.513 v1(13.081,41.021) ; U2.31 48.427,16.724 49.276,15.875 TP38.1
CLK-SCL: P2.3 P3.4 TP12.1 U2.20 | length 145.8
  Top Layer w0.203: v1@13.032,39.776 13.564,39.776 13.818,39.522 18.868,39.522 22.956,35.434 22.956,19.049 18.694,14.787 18.694,7.029 22.447,3.277 48.108,3.277 50.165,5.334 v1(50.165,5.588) 50.419,5.588 53.289,8.458 53.289,15.011 53.518,15.24 55.169,15.24 55.55,15.621 56.886,15.621 59.583,18.318 59.583,28.463 60.35,29.23 60.35,32.283 61.112,33.045 63.094,33.045 63.246,32.893 63.246,29.845 62.738,29.337 TP12.1
  Bottom Layer w0.203: P3.4 11.298,38.857 12.217,39.776 v1@13.032,39.776 ; v1(50.165,5.588) 51.435,5.588 59.69,-2.667 P2.3 ; U2.20 61.604,28.965 TP12.1
  other v1: 13.032,39.903
CS-D1: P2.7 TP10.1 U2.18 | length 66.5
  Top Layer w0.203: TP10.1 62.89,34.417 63.957,33.35 63.957,28.524 63.246,27.813 60.96,27.813 60.65,27.503 60.65,18.217 60.96,17.907 62.865,17.907 63.449,17.323 63.449,12.649 61.417,10.617 61.417,-12.014 62.23,-12.827 P2.7
  Bottom Layer w0.203: U2.18 58.302,31.505 61.214,34.417 TP10.1
CS-D2: P3.1 TP18.1 U2.11 | length 140.7
  Top Layer w0.203: v1(12.954,42.418) 15.138,40.234 19.163,40.234 23.668,35.729 23.668,18.754 19.406,14.492 19.406,7.323 22.71,4.019 46.056,4.019 47.74,5.703 47.74,14.42 49.957,16.637 57.399,16.637 59.228,18.466 59.228,28.61 59.411,28.793 59.411,35.458 54.534,40.335 50.622,40.335 v1(50.292,40.005)
  Bottom Layer w0.203: P3.1 11.401,40.357 12.319,41.275 12.319,42.037 12.573,42.291 v1@13.081,42.291 ; U2.11 49.697,39.41 v1(50.292,40.005) 56.896,46.609 TP18.1
DC-D1: P2.6 TP13.1 U2.21 | length 50.2
  Top Layer w0.203: TP13.1 62.865,26.797 63.246,26.416 63.246,19.558 64.16,18.644 64.16,12.355 62.128,10.323 62.128,-9.931 62.484,-10.287 P2.6
  Bottom Layer w0.203: U2.21 59.554,27.695 60.452,26.797 TP13.1
DISCHARGE: Q1.1 Q2.1 R11.1 TP21.1 U2.23 | length 103.1
  Top Layer w0.203: v1(27.686,38.735) 27.686,10.033 32.989,4.73 41.941,4.73 42.926,5.715 42.926,14.859 45.441,17.374 57.13,17.374 57.658,17.902 v1(57.658,24.257)
  Bottom Layer w0.203: U2.23 56.76,25.155 v1(57.658,24.257) 60.198,21.717 TP21.1
  Bottom Layer w0.254: R11.1 18.932,46.101 19.606,46.101 22.654,43.053 26.162,43.053 26.475,42.74 Q2.1 27.498,42.225 27.686,42.037 v1(27.686,38.735) 27.042,38.735 26.475,38.168 Q1.1
DM: P5.2 TP19.1 U2.13 | length 162.7
  Bottom Layer w0.241: P5.2@4.064,-21.082 4.572,-20.574 5.231,-20.574 6.109,-21.452 6.109,-25.172 7.988,-27.051 14.213,-27.051 15.864,-25.4 21.082,-25.4 22.365,-26.683 24.905,-26.683 28.321,-30.099 55.372,-30.099 63.411,-22.06 67.717,-22.06 68.663,-21.114 68.663,42.856 65.431,46.088 62.001,46.088 ; U2.13 52.553,37.886 52.553,38.468 53.708,39.624 54.452,39.624 60.916,46.088 62.001,46.088 ; TP19.1 61.976,46.114 62.001,46.088
DP: P5.3 TP20.1 U2.14 | length 161.7
  Bottom Layer w0.241: P5.3@3.556,-18.923 P5.3 4.572,-19.812 5.08,-19.812 6.477,-21.209 6.477,-25.019 8.141,-26.683 14.06,-26.683 15.711,-25.032 21.235,-25.032 22.517,-26.314 25.057,-26.314 28.474,-29.731 55.219,-29.731 63.259,-21.692 67.564,-21.692 68.294,-20.961 68.294,42.704 65.278,45.72 61.951,45.72 ; U2.14 53.188,37.89 53.188,38.583 53.861,39.256 54.604,39.256 61.069,45.72 61.951,45.72 ; TP20.1 61.976,45.695 61.951,45.72
EN: R1.1 S2.1 TP22.1 U2.3 | length 88.1
  Top Layer w0.203: S2.1 14.199,12.471 9.525,17.145 5.822,17.145 5.461,17.506 5.461,44.201 11.552,50.292 15.626,50.292 16.363,49.555 24.491,49.555 25.608,48.438 35.255,48.438 TP22.1
  Bottom Layer w0.203: R1.1 35.98,48.475 36.576,47.879 TP22.1 36.576,46.101 39.537,43.14 U2.3
GND: C1.2 C2.2 C3.2 C4.2 C5.1 C14.1 C16.2 C17.2 C18.2 C19.2 C20.2 C21.2 D1.2 D2.1 D3.3 D4.3 D5.3 D6.3 GND.1 GND.2 P1.2 P2.1 P3.3 P3.33 P3.S1 P3.S2 P4.0 P4.1 P5.4 Q1.2 Q2.2 R11.2 S2.2 S3.2 S4.2 S5.2 S6.2 S7.2 U1.2 U1.4 U2.1 U2.40 U2.101 | length 20.3
  Bottom Layer w0.203: P3.33 11.176,24.357 11.32,24.213 11.333,24.213 11.416,24.13 11.938,24.13 v1(12.446,23.622)
  Bottom Layer w0.508: 5.314,42.057 P3.S2 ; 5.989,19.157 P3.S1 ; 7.381,16.779 P3.S1 ; 7.381,21.605 P3.S1 ; 7.381,40.117 P3.S2 ; 7.381,44.562 P3.S2 ; 9.886,19.157 P3.S1 ; 10.14,42.057 P3.S2
  other v1: 7.874,-21.717 16.51,-18.923 17.78,-18.923 6.096,-18.415 63.5,-8.89 63.5,-3.81 57.531,4.953 63.119,9.906 35.306,12.065 44.196,12.065 46.482,12.065 48.514,12.065 51.054,12.065 54.356,12.065 56.896,12.065 58.928,12.065 5.969,12.446 21.844,12.827 5.207,13.462 47.879,15.748 34.417,18.288 35.56,18.288 20.574,18.923 20.574,21.463 20.574,23.241 20.574,25.146 20.574,27.051 65.405,28.448 25.4,28.575 26.67,34.163 35.306,38.354 32.385,38.481 26.543,39.243 32.385,40.894 27.94,43.307 36.322,43.307 20.574,43.561 30.226,45.339 32.004,45.339 24.511,47.498 50.546,48.641 57.15,49.149 12.827,51.054 50.952,53.492
I2C-SCL: P4.4 R8.2 TP3.1 U2.15 | length 137.6
  Top Layer w0.203: P4.4 3.532,8.025 2.794,8.763 2.794,12.065 3.556,12.827 v1(3.556,15.621) 3.556,16.393 3.327,16.622 3.327,45.105 13.061,54.839 46.375,54.839 50.287,50.927 51.298,50.927 52.822,49.403 54.889,49.403 55.829,48.463 55.829,45.771 59.563,42.037 TP3.1
  Bottom Layer w0.203: v1(3.556,15.621) 3.556,14.859 4.064,14.351 R8.2 ; U2.15 57.108,35.315 58.669,36.876 58.669,40 60.706,42.037 TP3.1
I2C-SDA: P4.3 R9.2 TP4.1 U2.4 | length 143.8
  Top Layer w0.203: P4.3 3.548,9.025 3.302,9.271 3.302,12.07 3.912,12.68 3.912,14.453 v1(4.445,14.986) 4.445,16.007 3.683,16.769 3.683,44.958 13.208,54.483 46.228,54.483 50.14,50.571 51.15,50.571 52.674,49.047 54.742,49.047 55.474,48.316 55.474,45.822 54.229,44.577 40.513,44.577 39.116,45.974 TP4.1
  Bottom Layer w0.203: v1(4.445,14.986) 5.334,15.875 R9.2 ; TP4.1 39.116,45.593 40.386,44.323 40.386,40.005 40.807,39.584 U2.4
LED1: R2.1 TP6.1 U2.6 | length 72.8
  Top Layer w0.203: R2.1 20.066,9.779 19.812,10.033 19.812,14.396 24.023,18.607 24.023,42.56 26.797,45.334 26.797,47.634 27.245,48.082 33.706,48.082 35.687,46.101 37.44,46.101 37.846,46.507 37.846,47.879 38.354,48.387 43.688,48.387 44.196,47.879 TP6.1
  Bottom Layer w0.203: U2.6 43.347,42.204 44.196,43.053 TP6.1
MISO-D2: P3.6 TP9.1 U2.17 | length 133
  Top Layer w0.203: v1(12.573,37.719) 13.589,38.735 18.542,38.735 22.169,35.108 22.169,19.375 17.907,15.113 17.907,6.81 22.177,2.54 50.983,2.54 58.166,9.723 58.166,15.88 60.294,18.009 60.294,27.909 60.706,28.321 63.246,28.321 63.602,28.677 63.602,33.071 63.271,33.401 60.932,33.401 60.452,33.881 60.452,36.449 60.96,36.957 TP9.1
  Bottom Layer w0.203: P3.6 10.492,37.846 11.303,37.846 11.43,37.719 v1(12.573,37.719) ; U2.17 58.048,32.775 60.198,34.925 60.198,36.449 60.706,36.957 TP9.1
MODE: S3.1 TP0.1 U2.27 | length 69
  Top Layer w0.203: S3.1 10.668,7.239 11.43,8.001 16.213,8.001 22.03,2.184 51.13,2.184 58.522,9.576 58.522,10.185 59.817,11.481 59.817,13.716 TP0.1
  Bottom Layer w0.203: U2.27 53.507,18.223 55.194,16.535 57.836,16.535 59.436,14.935 TP0.1
MOSI-SDA: P2.4 P3.5 TP11.1 U2.19 | length 138.6
  Top Layer w0.203: v1(12.7,38.862) 13.208,38.862 13.462,39.116 18.7,39.116 22.55,35.266 22.55,19.217 18.288,14.955 18.288,6.932 22.299,2.921 49.022,2.921 v1(51.054,4.953) 55.626,9.525 55.626,14.859 56.032,15.265 57.048,15.265 59.939,18.156 59.939,28.316 60.731,29.108 60.731,31.648 60.96,31.877 TP11.1
  Bottom Layer w0.203: P3.5 10.484,38.354 11.557,38.354 12.065,38.862 v1(12.7,38.862) ; v1(51.054,4.953) 61.214,-5.207 P2.4 ; U2.19 60.334,30.235 TP11.1
NetC5_2: C5.2 P3.9 | length 12.4
  Bottom Layer w0.203: P3.9 12.216,36.357 13.386,37.527 13.386,38.299 14.752,39.665 14.752,41.878 15.748,42.874 15.748,44.196 16.129,44.577 C5.2
NetC6_1: C6.1 P3.12 | length 11.5
  Bottom Layer w0.203: P3.12 11.219,34.857 13.741,37.38 13.741,38.152 15.107,39.518 15.107,41.731 16.175,42.799 C6.1
NetC6_2: C6.2 P3.13 | length 13.4
  Bottom Layer w0.203: P3.13 11.221,34.357 14.097,37.233 14.097,38.005 15.463,39.371 15.463,40.915 16.323,41.775 18.28,41.775 18.678,42.173 C6.2
NetC7_1: C7.1 P3.14 | length 10.8
  Bottom Layer w0.203: P3.14 11.224,33.857 14.453,37.085 14.453,37.857 15.818,39.223 15.818,40.71 16.129,41.021 C7.1
NetC7_2: C7.2 P3.15 | length 12.6
  Bottom Layer w0.203: P3.15 11.227,33.357 14.808,36.938 14.808,37.71 16.163,39.065 16.174,39.065 16.174,39.848 16.458,40.132 18.415,40.132 18.678,40.395 C7.2
NetC8_1: C8.1 P3.16 | length 9.9
  Bottom Layer w0.203: P3.16 11.23,32.857 15.164,36.791 15.164,37.563 16.31,38.71 16.946,38.71 16.978,38.742 C8.1
NetC8_2: C8.2 P3.17 | length 11.9
  Bottom Layer w0.203: P3.17 11.233,32.357 15.519,36.643 15.519,37.416 16.458,38.354 18.415,38.354 18.678,38.617 C8.2
NetC9_1: C9.1 P3.18 | length 9.3
  Bottom Layer w0.203: P3.18 11.236,31.857 15.875,36.496 15.875,37.251 16.089,37.465 C9.1
NetC9_2: C9.2 P3.19 | length 11.1
  Bottom Layer w0.203: P3.19 11.239,31.357 16.458,36.576 18.415,36.576 18.678,36.839 C9.2
NetC10_1: C10.1 P3.21 | length 10.8
  Bottom Layer w0.203: P3.21 12.017,30.357 16.458,34.798 18.415,34.798 18.678,35.061 C10.1
NetC10_2: C10.2 P3.20 | length 8.5
  Bottom Layer w0.203: P3.20 11.299,30.857 16.129,35.687 C10.2
NetC11_1: C11.1 P3.23 | length 10.4
  Bottom Layer w0.203: P3.23 12.795,29.357 16.458,33.02 18.415,33.02 18.678,33.283 C11.1
NetC11_2: C11.2 P3.22 | length 8.2
  Bottom Layer w0.203: P3.22 12.02,29.857 16.072,33.909 C11.2
NetC12_1: C12.1 P3.25 | length 10.1
  Bottom Layer w0.203: P3.25 13.573,28.357 16.458,31.242 18.415,31.242 18.678,31.505 C12.1
NetC12_2: C12.2 P3.24 | length 7.9
  Bottom Layer w0.203: P3.24 12.855,28.857 16.129,32.131 C12.2
NetC13_1: C13.1 P3.27 | length 9.8
  Bottom Layer w0.203: P3.27 14.351,27.357 16.458,29.464 18.415,29.464 18.678,29.727 C13.1
NetC13_2: C13.2 P3.26 | length 7.5
  Bottom Layer w0.203: P3.26 13.633,27.857 16.129,30.353 C13.2
NetC15_1: C15.1 P3.29 | length 9.4
  Bottom Layer w0.203: P3.29 15.129,26.357 16.593,27.821 17.633,27.821 17.782,27.97 17.782,28.45 17.907,28.575 C15.1
NetC15_2: C15.2 P3.28 | length 7.2
  Bottom Layer w0.203: P3.28 14.411,26.857 16.129,28.575 C15.2
NetC16_1: C16.1 P3.34 Q1.3 | length 22.1
  Bottom Layer w0.203: P3.34 11.186,23.857 12.056,22.987 13.462,22.987 16.978,26.503 C16.1 17.653,26.797 17.874,27.018 17.874,27.402 18.158,27.686 19.25,27.686 24.325,32.761 Q1.3
NetC17_1: C17.1 D2.2 P3.35 | length 22
  Bottom Layer w0.203: P3.35 11.183,23.357 11.909,22.631 13.868,22.631 16.256,25.019 C17.1 16.978,25.614 17.272,25.908 21.082,25.908 24.571,29.397 24.571,30.788 25.4,31.617 D2.2
  Bottom Layer w0.254: D2.2@25.146,33.427 D2.2
NetC18_1: C18.1 P3.36 Q2.3 | length 37.2
  Bottom Layer w0.203: P3.36 11.18,22.857 12.219,21.819 15.924,21.819 16.323,22.217 16.677,22.217 16.978,22.518 C18.1 16.978,23.836 17.232,24.09 25.614,24.09 27.305,25.781 27.305,35.499 27.005,35.799 25.675,35.799 25.263,36.212 25.263,40.337 Q2.3
NetC19_1: C19.1 C20.1 D3.2 D4.2 D5.2 D6.2 Q3.D | length 54.9
  Bottom Layer w0.381: D3.2@15.982,51.689 15.782,51.489 15.782,50.893 16.51,50.165 28.448,50.165 ; Q3.D 27.94,46.355 28.448,46.863 28.448,50.165 ; D4.2@28.682,51.689 28.482,51.489 28.482,50.165 ; C19.1 30.226,50.165 ; C20.1 32.004,50.165 ; D5.2@41.382,51.689 41.382,50.185 41.402,50.165 ; D6.2@54.082,51.689 54.082,50.526 53.721,50.165 41.402,50.165 ; 28.448,50.165 28.482,50.165 ; 28.482,50.165 30.226,50.165 ; 30.226,50.165 32.004,50.165 ; 32.004,50.165 41.402,50.165
NetC21_1: C21.1 P3.37 | length 6.9
  Bottom Layer w0.203: P3.37 10.537,22.301 11.227,22.301 12.065,21.463 C21.1
NetD1_1: D1.1 R2.2 | length 1.8
  Top Layer w0.203: R2.2 D1.1
NetD3_4: D3.4 D4.1 | length 7.7
  Bottom Layer w0.203: D3.4 D4.1
NetD4_4: D4.4 D5.1 | length 7.7
  Bottom Layer w0.203: D4.4 D5.1
NetD5_4: D5.4 D6.1 | length 7.7
  Bottom Layer w0.203: D5.4 D6.1
NetP3_30: P3.30 R10.2 | length 19.3
  Top Layer w0.203: v1(11.938,18.542) 13.741,20.345 13.741,24.867 12.954,25.654 v1(12.446,25.654)
  Bottom Layer w0.203: P3.30 11.608,25.857 11.811,25.654 v1(12.446,25.654) ; v1(11.938,18.542) 11.938,17.653 12.438,17.153 18.55,17.153 18.678,17.281 R10.2
NetTP1_1: TP1.1 U2.39 | length 12.8
  Bottom Layer w0.203: TP1.1 28.956,15.367 31.14,17.551 37.998,17.551 38.267,17.82 U2.39
NetTP2_1: TP2.1 U2.38 | length 11.7
  Bottom Layer w0.203: TP2.1 31.496,15.367 33.02,16.891 38.862,16.891 39.537,17.566 U2.38
NetTP14_1: TP14.1 U2.22 | length 7.7
  Bottom Layer w0.203: U2.22 58.03,26.425 60.198,24.257 TP14.1
NetTP35_1: TP35.1 U2.28 | length 8
  Bottom Layer w0.203: U2.28 52.237,18.223 54.585,15.875 56.388,15.875 56.896,15.367 TP35.1
NetTP36_1: TP36.1 U2.29 | length 6.8
  Bottom Layer w0.203: U2.29 50.967,17.74 53.34,15.367 54.102,15.367 54.356,15.113 TP36.1
NetTP37_1: TP37.1 U2.30 | length 5.8
  Bottom Layer w0.203: U2.30 49.697,17.486 51.816,15.367 TP37.1
NetTP39_1: TP39.1 U2.32 | length 5.1
  Bottom Layer w0.203: TP39.1 46.736,15.875 47.157,16.296 U2.32
NetTP40_1: TP40.1 U2.33 | length 5.7
  Bottom Layer w0.203: TP40.1 44.196,15.113 45.887,16.804 U2.33
NetTP41_1: TP41.1 U2.34 | length 6.2
  Bottom Layer w0.203: TP41.1 41.656,14.986 44.617,17.947 U2.34
NetTP42_1: TP42.1 U2.35 | length 7.3
  Bottom Layer w0.203: TP42.1 40.132,14.097 40.284,14.249 40.284,15.011 43.347,18.074 U2.35
NetTP46_1: TP46.1 U2.16 | length 10.2
  Bottom Layer w0.203: U2.16 57.794,34.045 59.436,35.687 59.436,37.719 61.214,39.497 TP46.1
NP-DATA: D3.1 TP5.1 U2.5 | length 49.2
  Top Layer w0.203: D3.1 15.148,50.648 15.773,50.648 16.51,49.911 24.765,49.911 25.883,48.793 44.806,48.793 45.364,48.235 45.364,46.253 45.134,46.023 41.861,46.023 41.656,46.228 TP5.1
  Bottom Layer w0.203: TP5.1 41.656,40.767 42.077,40.346 U2.5
NP-PWR: Q3.G R12.2 TP48.1 U2.25 | length 111.5
  Top Layer w0.203: v1(27.686,47.371) 27.153,46.838 27.153,45.187 24.384,42.418 24.384,12.832 32.842,4.375 45.142,4.375 45.72,4.953 45.72,15.748 46.99,17.018 57.277,17.018 58.014,17.755 58.014,20.041 58.293,20.32 v1(58.293,20.828)
  Bottom Layer w0.203: R12.2 16.978,48.553 17.32,48.895 25.654,48.895 26.475,48.074 Q3.G 27.62,47.305 v1(27.686,47.371) ; U2.25 56.506,22.615 v1(58.293,20.828) 59.182,19.939 59.182,17.399 59.944,16.637 TP48.1
RESET-D1: P2.5 TP8.1 U2.12 | length 75.4
  Top Layer w0.203: v1(54.864,42.545) 56.134,42.545 57.658,41.021 62.484,41.021 63.246,40.259 63.246,34.671 64.313,33.604 64.313,28.377 63.627,27.691 63.627,19.68 64.516,18.791 64.516,10.324 62.484,8.292 62.484,-6.985 63.246,-7.747 P2.5
  Bottom Layer w0.203: U2.12 50.967,38.648 v1(54.864,42.545) TP8.1
RESET-D2: P3.7 TP45.1 U2.26 | length 118.5
  Top Layer w0.203: v1(7.112,37.338) 7.112,21.336 10.795,17.653 15.621,17.653 16.891,16.383 16.891,11.811 16.129,11.049 13.462,11.049 8.992,6.579 8.992,5.359 10.16,4.191 19.521,4.191 21.883,1.829 51.277,1.829 58.877,9.429 58.877,10.038 60.173,11.334 60.173,12.294 TP45.1
  Bottom Layer w0.203: v1(7.112,37.338) 10.462,37.338 P3.7 ; U2.26 56.252,21.345 58.166,19.431 58.166,17.297 59.842,15.621 60.452,15.621 TP45.1
RXD-IN: P1.4 TP24.1 U2.36 | length 55.1
  Bottom Layer w0.203: U2.36 42.077,17.82 39.7,15.443 37.033,15.443 36.576,14.986 TP24.1 36.576,12.065 39.37,9.271 60.706,9.271 64.46,13.025 64.46,19.375 65.774,20.689 67.068,20.689 67.564,20.193 67.564,18.161 P1.4
TXD-OUT: P1.3 TP23.1 U2.37 | length 55.6
  Bottom Layer w0.203: U2.37 40.807,17.693 39.319,16.205 35.128,16.205 34.036,15.113 TP23.1 34.036,12.065 37.973,8.128 62.611,8.128 65.532,11.049 65.532,18.669 P1.3
VBAT: P5.5 S1.3 | length 135.3
  Top Layer w0.508: P5.5 5.207,-12.319 13.97,-12.319 15.748,-14.097 19.05,-14.097 20.574,-15.621 20.574,-19.685 22.098,-21.209 67.056,-21.209 67.818,-20.447 67.818,31.623 64.262,35.179 64.262,38.989 S1.3
VCC: C2.1 S1.2 U1.1 | length 117.7
  Top Layer w0.508: v1(16.764,-16.637) v1(18.034,-16.637) 18.796,-16.637 19.304,-17.145 19.304,-19.939 21.234,-21.869 67.66,-21.869 68.478,-21.051 68.478,31.947 65.024,35.401 65.024,37.211 S1.2
VSTVC: C14.2 P3.39 P3.40 R10.1 | length 10.1
  Bottom Layer w0.203: P3.40 11.43,20.857 ; P3.39 11.282,21.357 11.43,21.209 11.43,20.857 ; R10.1 C14.2 12.573,19.685 11.43,20.828 11.43,20.857
pads on no net: D6.4 P2.M1 P2.M2 P2.M3 P2.M4 P3.10 P3.11 P5.M1

## Polygon pours and split planes (outlines as drawn)
GND on Bottom Layer "Bottom-GND" (solid, remove dead copper, pour order 29): -10.922,78.359 110.236,78.359 110.236,-28.321 cw(c107.696,-28.321) 107.696,-30.861 6.096,-39.878 cw(c-0.762,-28.194) -12.446,-35.052
GND on Bottom Layer "Bottom Layer-No Net" (solid, pour order 21): 18.644,-17.907 12.243,-17.907 10.693,-16.358 10.693,-13.005 10.262,-12.573 9.398,-12.573 5.512,-16.459 5.512,-19.253 6.248,-19.99 6.248,-22.276 9.22,-25.248 10.541,-25.248 10.541,-21.946 12.319,-20.168 17.755,-20.168 18.644,-19.279
VCC on Bottom Layer "Bottom Layer-No Net" (solid, pour order 25): 11.786,-12.852 11.938,-12.7 17.78,-12.7 18.644,-13.564 18.644,-17.704 12.421,-17.704 11.786,-17.069
3.3V on Bottom Layer "Bottom Layer-No Net" (solid, pour order 22): 12.548,-20.752 14.834,-20.752 14.834,-23.901 13.487,-25.248 11.735,-25.248 11.735,-21.565
GND on Top Layer "Top-GND" (solid, remove dead copper, pour order 27): -10.922,78.359 109.855,78.359 109.855,-28.323 cw(c107.315,-28.323) 107.315,-30.863 3.429,-37.467 cw(c-2.35,-27.37) -12.446,-33.149

## Keep-outs
Keep-Out Layer:
  the board outline again, w0.203

## Other copper
Top Layer:
  text ".Layer_Name" at 79.432,36.282 h1.52
Bottom Layer:
  pour cut-out: 6.581,43.822 8.181,43.822 8.346,43.657 8.346,43.022 8.981,43.022 9.146,42.857 9.146,41.102 9.136,41.092 6.581,41.092 6.416,41.257 6.416,43.657
  pour cut-out: 6.581,20.122 9.167,20.122 9.167,18.192 8.346,18.192 8.346,17.557 8.181,17.392 6.581,17.392 6.416,17.557 6.416,19.957
  pour cut-out: 6.581,19.957 8.981,19.957 8.981,18.357 8.181,18.357 8.181,17.557 6.581,17.557
  text ".Layer_Name" at 79.432,33.488 h1.52

## Silkscreen, mask and mechanical layers (free items; w line width, h text height)
Top Overlay:
  lines w0.203: 67.818,34.925 69.464,34.925 69.464,42.545 67.818,42.545 ; 17.907,-6.985 20.447,-6.985 20.447,-1.905 17.907,-1.905 17.907,-6.985 ; 17.907,-1.524 20.447,-1.524 20.447,3.556 17.907,3.556 17.907,-1.524
  text ".Layer_Name" at 79.432,41.87 h1.52
  text "BAT" at 69.215,40.894 h0.51 r90
  text "5V/OFF" at 69.215,35.179 h0.51 r90
  text "I am nobody.." at 16.256,28.448 h2.54
  text "5V" at 69.215,24.13 h0.64 r90
  text "GND" at 69.342,21.463 h0.64 r90
  text "TXD" at 69.342,18.669 h0.64 r90
  text "RXD" at 69.342,16.002 h0.64 r90
  text "BOOTL" at 8.89,3.937 h0.76
  text "RESET" at 13.335,3.937 h0.76
  text "2024" at 41.656,-7.239 h2.54
  text "Offensive Summit" at 35.56,-11.303 h1.52
Bottom Overlay:
  drawing of 30 lines, arcs and shapes, not listed
  text "String" at -146.685,90.678 h1.52
  text ".Layer_Name" at 79.432,28.154 h1.52
  text "REV1" at 1.016,4.826 h0.76 r270
Top Paste:
  text ".Layer_Name" at 79.42,44.9 h1.52
Bottom Paste:
  text ".Layer_Name" at 79.72,25.1 h1.52
Top Solder:
  text ".Layer_Name" at 79.432,39.076 h1.52
Bottom Solder:
  text ".Layer_Name" at 79.432,30.694 h1.52
Dimension:
  text ".Layer_Name" at 79.432,12.152 h1.52
Stackup:
  lines w0.381: -1.517,61.547 8.895,61.547 32.511,61.547 54.349,61.547 70.855,61.547 ; -1.517,64.595 8.895,64.595 32.511,64.595 54.349,64.595 70.855,64.595 ; -1.517,73.739 8.895,73.739 32.511,73.739 54.349,73.739 70.855,73.739 ; -1.517,76.787 8.895,76.787 32.511,76.787 54.349,76.787 70.855,76.787 ; -1.517,79.835 70.843,79.835 ; 8.895,82.883 8.895,58.499 ; 32.511,82.883 32.511,58.499 ; 54.349,82.883 54.349,58.499 ; 70.843,82.883 -1.517,82.883 -1.517,58.499 8.895,58.499 ; 70.855,82.883 70.855,58.499 54.349,58.499 ; 8.895,58.499 32.511,58.499 ; 8.895,67.643 -1.517,67.643 8.895,67.643 ; 8.895,67.643 32.511,67.643 ; 8.895,67.643 32.511,67.643 ; 8.895,70.691 -1.517,70.691 8.895,70.691 ; 8.895,70.691 32.511,70.691 ; 8.895,70.691 32.511,70.691 ; 32.511,58.499 54.349,58.499 ; 32.511,67.643 54.349,67.643 ; 32.511,67.643 54.349,67.643 ; 32.511,70.691 54.349,70.691 ; 32.511,70.691 54.349,70.691 ; 54.349,67.643 70.855,67.643 54.349,67.643 ; 54.349,70.691 70.855,70.691 54.349,70.691
  text "OS-2024-Badge-REV1" at -1.547,84.661 h1.52
  text "Layer" at 0.007,80.597 h1.52
  text "Name" at 10.419,80.597 h1.52
  text "Material" at 34.035,80.597 h1.52
  text "Thickness" at 55.873,80.597 h1.52
  text "1" at 0.007,77.549 h1.52
  text "Top Overlay" at 10.419,77.549 h1.52
  text "2" at 0.007,74.501 h1.52
  text "Top Solder" at 10.419,74.501 h1.52
  text "Solder Resist" at 34.035,74.501 h1.52
  text "0.40mil" at 55.873,74.501 h1.52
  text "3" at 0.007,71.453 h1.52
  text "TOP" at 10.419,71.453 h1.52
  text "Copper" at 34.035,71.453 h1.52
  text "1.35mil" at 55.873,71.453 h1.52
  text "4" at 0.007,68.405 h1.52
  text "Core" at 10.419,68.405 h1.52
  text "FR-4" at 34.035,68.405 h1.52
  text "59.5mil" at 55.873,68.405 h1.52
  text "5" at 0.007,65.357 h1.52
  text "BOTTOM" at 10.419,65.357 h1.52
  text "Copper" at 34.035,65.357 h1.52
  text "1.35mil" at 55.873,65.357 h1.52
  text "6" at 0.007,62.309 h1.52
  text "Bottom Solder" at 10.419,62.309 h1.52
  text "Solder Resist" at 34.035,62.309 h1.52
  text "0.40mil" at 55.873,62.309 h1.52
  text "7" at 0.007,59.261 h1.52
  text "Bottom Overlay" at 10.419,59.261 h1.52
  text ".Layer_Name" at 79.432,15.2 h1.52
Board Outline:
  the board outline again, w0.203
Comments:
  lines w0.203: 111.162,78.339 110.462,78.339 ; 110.462,78.339 110.462,78.339
Drill Drawing:
  circle w0.254: c2.118,-54.602 r0.847
  circle w0.254: c2.118,-66.032 r0.508
  circle w0.254: c2.118,-66.032 r0.847
  lines w0.254: 1.272,-82.118 2.118,-81.695 2.965,-82.118 2.542,-81.272 2.965,-80.425 2.118,-80.848 1.272,-80.425 1.695,-81.272 1.272,-82.118 ; 1.272,-78.308 2.965,-78.308 2.965,-76.615 1.272,-76.615 1.272,-78.308 ; 1.272,-74.498 2.965,-74.498 2.965,-72.805 1.272,-72.805 1.272,-74.498 ; 1.272,-70.265 1.695,-70.265 2.118,-70.688 2.542,-70.265 2.965,-70.265 2.542,-69.842 2.965,-69.418 2.542,-69.418 2.118,-68.995 1.695,-69.418 1.272,-69.418 1.695,-69.842 1.272,-70.265 ; 1.272,-62.222 2.118,-63.068 2.965,-62.222 2.118,-61.375 1.272,-62.222 ; 1.272,-58.835 1.695,-58.835 1.695,-59.258 2.542,-59.258 2.542,-58.835 2.965,-58.835 2.965,-57.988 2.542,-57.988 2.542,-57.565 1.695,-57.565 1.695,-57.988 1.272,-57.988 1.272,-58.835 ; 1.61,-74.16 2.626,-74.16 2.626,-73.144 1.61,-73.144 1.61,-74.16
  lines w0.381: -0.247,-83.261 71.921,-83.261 ; -0.247,-52.781 71.921,-52.781 ; 13.745,-87.071 13.745,-48.971 ; 28.473,-87.071 28.473,-48.971 ; 57.929,-87.071 57.929,-48.971 ; -0.247,-87.071 71.921,-87.071 71.921,-48.971 -0.247,-48.971 -0.247,-87.071
  text ".Legend" at -67.97,125.298 h1.52
  text ".Layer_Name" at 79.432,9.523 h1.52
  text "Symbol" at 2.039,-51.638 h1.83
  text "Count" at 14.888,-51.638 h1.83
  text "Hole Size" at 29.616,-51.638 h1.83
  text "Plated" at 59.072,-51.638 h1.83
  text "1" at 14.888,-55.448 h1.52
  text "6.700mm (263.78mil)" at 29.616,-55.448 h1.52
  text "PTH" at 59.072,-55.448 h1.52
  text "4" at 14.888,-59.258 h1.52
  text "3.658mm (144.00mil)" at 29.616,-59.258 h1.52
  text "PTH" at 59.072,-59.258 h1.52
  text "8" at 14.888,-63.068 h1.52
  text "2.000mm (78.74mil)" at 29.616,-63.068 h1.52
  text "PTH" at 59.072,-63.068 h1.52
  text "12" at 14.888,-66.878 h1.52
  text "1.200mm (47.24mil)" at 29.616,-66.878 h1.52
  text "PTH" at 59.072,-66.878 h1.52
  text "13" at 14.888,-70.688 h1.52
  text "1.800mm (70.87mil)" at 29.616,-70.688 h1.52
  text "PTH" at 59.072,-70.688 h1.52
  text "16" at 14.888,-74.498 h1.52
  text "0.889mm (35.00mil)" at 29.616,-74.498 h1.52
  text "PTH" at 59.072,-74.498 h1.52
  text "48" at 14.888,-78.308 h1.52
  text "0.900mm (35.43mil)" at 29.616,-78.308 h1.52
  text "PTH" at 59.072,-78.308 h1.52
  text "69" at 14.888,-82.118 h1.52
  text "0.381mm (15.00mil)" at 29.616,-82.118 h1.52
  text "PTH" at 59.072,-82.118 h1.52
  text "171 Total" at 14.888,-85.928 h1.52

## Dimensions
2.54,55.753 to 2.54,-31.369 on Dimension
0,-28.829 to 69.723,-28.829 on Dimension

## Text inside footprints (layer, text, board x,y; h text height)
P5: Top Overlay "BATT" at 13.208,-9.398 h1.52 r180; Top Overlay "USB" at 8.763,-29.083 h1.52